# EAGLE board microsd (EAGLE 9.6.2)

No outline drawn. Coordinates in mm, seen from the top.
Copper layers (1*16): Top 0.035mm / dielectric 1.5mm / Bottom 0.035mm
Design rules "default *": minimum track width 12mil, minimum drill 19mil, track to track 12mil, track to pad 12mil, pad to pad 12mil, via to via 12mil, smd to smd 0mil, copper to edge 10mil, drill to drill 8mil, minimum pad ring 10mil, minimum via ring 8mil, stop-mask expansion 4mil, vias tented up to drill 20mil, thermal gap 10mil

## Footprints (pad centres in the part's own frame; a part is rotated, then mirrored left to right if it is on the bottom)
1X08-BIG = drill 1.016 pad 1.778 octagon: 1 -8.89,0; 2 -6.35,0; 3 -3.81,0; 4 -1.27,0; 5 1.27,0; 6 3.81,0; 7 6.35,0; 8 8.89,0

## Placement (x,y rotation side)
JP1  [1X08-BIG]  30.48,12.57 90 top

## Library data of the parts
JP1 = adafruit

## Nets
+3V3: JP1.2
CD: JP1.8
CLK: JP1.4
CS: JP1.7
DI: JP1.6
DO: JP1.5
GND: JP1.3
VCC: JP1.1

## Text on the board
tNames: CD | CS | DI | DO | CLK | GND | 3v | 5v